# Altium PCB LedBlinker Rounded.PcbDoc
Units mil, origin at the board's own origin, x right, y up, seen from the top; angles counter-clockwise.
Board outline 1050 x 1050 mil, 2 copper layers (Top Layer, Bottom Layer), stack 64.8 mil thick; 36 components, 35 nets, 124 pads, 0 vias.
Unrouted connection lines stored in the file: 81.
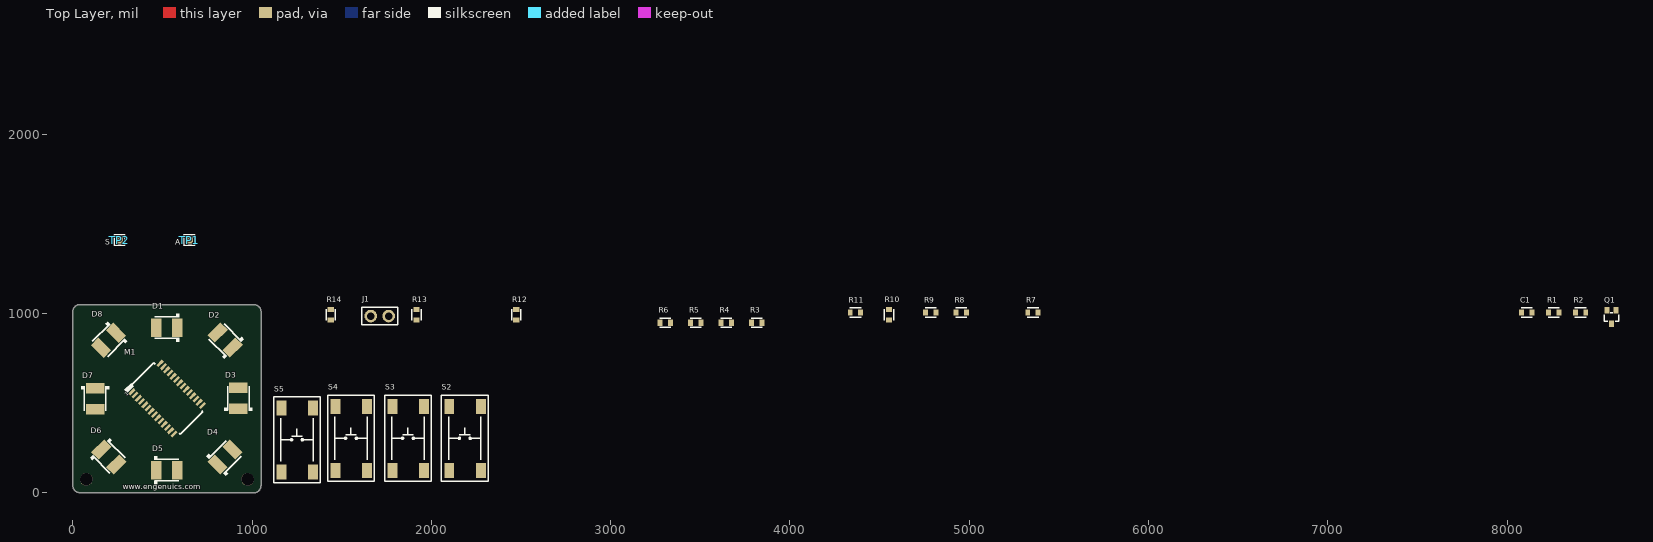
[diagram p0: Top Layer view]
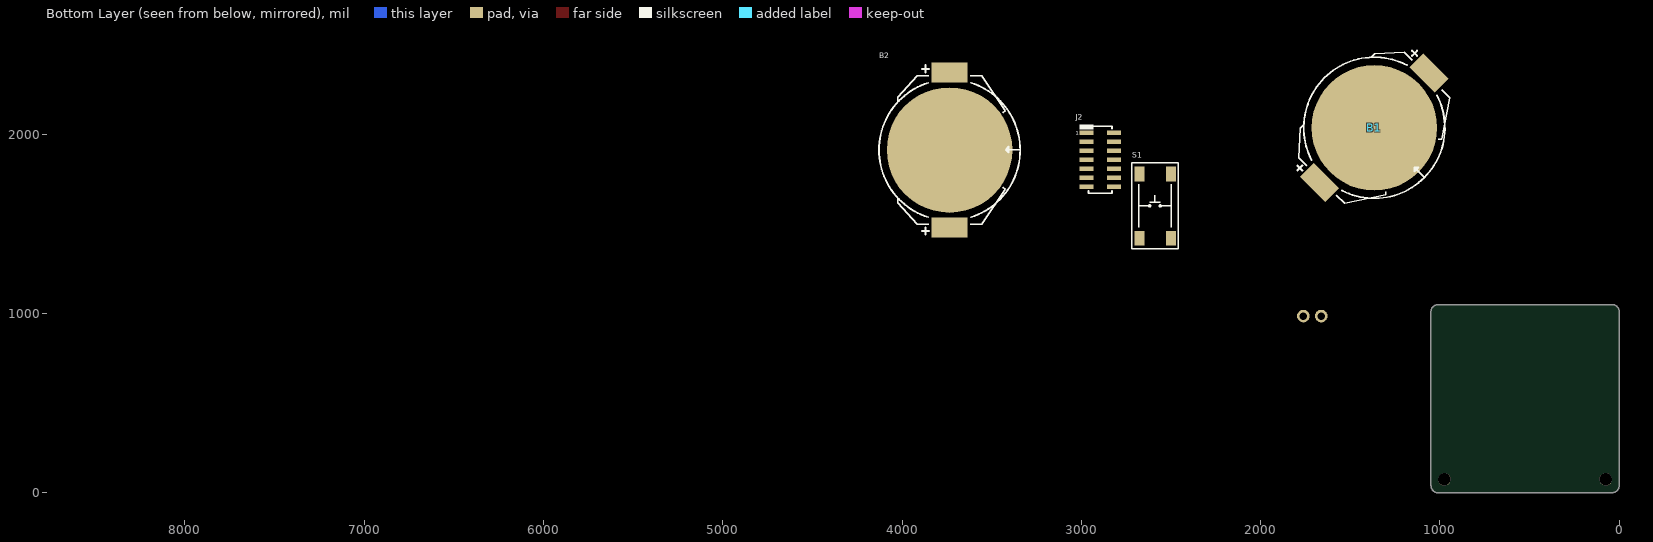
[diagram p1: Bottom Layer view, seen from below]

## Layer stack, top to bottom
Top Solder: solder mask 0.4, Solder Resist, Dk 3.5
Top Layer: signal copper 1.4
Dielectric1: core 62, FR-4, Dk 4.8
Bottom Layer: signal copper 1.4
Bottom Solder: solder mask 0.4, Solder Resist, Dk 3.5

## Board outline
0,40 0,1010 0,1010.43 cw(c40,1010) 39.57,1050 40,1050 1010,1050 1010.43,1049.57 cw(c1010,1009.57) 1050,1010 1050,40 1049.57,39.57 cw(c1009.57,40) 1010,0 40,0 39.57,0.43 cw(c40,40.43)

## Design rules (kind name [scope] priority, off if disabled: settings)
Clearance ClearancePolygon [All vs InPoly] p1: gap=20 ignorepadtopadclearanceinfootprint=FALSE except(0: Arc-Hole Track-Hole SMDPad-Hole THPad-Hole Via-Hole Fill-Hole Poly-Hole Region-Hole Text-Hole)
Clearance [All] p2: gap=7 ignorepadtopadclearanceinfootprint=FALSE except(0: Arc-Hole Track-Hole SMDPad-Hole THPad-Hole Via-Hole Fill-Hole Poly-Hole Region-Hole Text-Hole)
HoleSize [All] p1: absolutevalues=TRUE maxlimit=250 minlimit=17 maxpercent=80.000 minpercent=20.000
MinimumSolderMaskSliver [All] p1 off: minsoldermaskwidth=10
PolygonConnect PolygonConnectVia [All vs IsVia] p1: connectstyle=Direct reliefconductorwidth=10 reliefentries=4 polygonreliefangle="90 Angle" airgapwidth=10
PolygonConnect [All] p2: connectstyle=Relief reliefconductorwidth=10 reliefentries=4 polygonreliefangle="90 Angle" airgapwidth=10
RoomDefinition myLEDBlinker [InComponentClass('myLEDBlinker')] p1: confinementstyle=ConfineIn formatcopy=TRUE lockcomponents=FALSE outline 1095,55 8643,55 8643,1141 1095,1141
RoutingVias [All] p1: holewidth=17 width=26 viastyle="Through Hole" minholewidth=17 minwidth=26 maxholewidth=200 maxwidth=250
SilkToSilkClearance [All] p1 off: silktosilkclearance=10
SilkToSolderMaskClearance SilkscreenOverComponentPads [IsPad] p1 off: minsilkscreentomaskgap=7 clearancetoexposedcopper=TRUE
SolderMaskExpansion [All] p1: expansion=0
Width [All] p1: maxlimit=250 minlimit=7 preferedwidth=10
26 further rules are at their usual default settings.

## Components (designator, comment, footprint, x,y, rotation, side; value= is the part's Value field where it differs from the comment)
B1 "CR2032" "CONN BATTERY HOLDER CR2032" 1366,2036 r135 bottom
B2 "CR2032" "CONN BATTERY HOLDER CR2032" 3735,1912 r90 bottom
C1 "1uF" 0603 8110,1006 r0 top
D1 "CYN" "PLCC-2 AK" 524,921 r90 top
D2 "GRN" "PLCC-2 AK" 850,852 r45 top
D3 "YLW" "PLCC-2 AK" 923,527.09 r0 top
D4 "ORG" "PLCC-2 AK" 849.28,199.28 r315 top
D5 "RED" "PLCC-2 AK" 524,126 r270 top
D6 "PNK" "PLCC-2 AK" 201,200 r225 top
D7 "PRPL" "PLCC-2 AK" 125,525 r180 top
D8 "BLU" "PLCC-2 AK" 199.72,850.72 r135 top
J1 "RESET PADS" HDR1X2 1712,986 r0 top
J2 "JTAG/SERIAL" "CONN 14POS 7X2 SMT FEMALE SMALL" 2894.65,1858 r180 bottom
M1 "MSP430F2122" TSSOP28 526,525 r315 top
Q1 "DMG1013" SC-70-3 8582,980 r0 top
R1 "100k" 0603 8260,1006 r0 top
R2 "100k" 0603 8410,1006 r0 top
R3 "390R" 0603 3815,948 r0 top
R4 "390R" 0603 3645,948 r0 top
R5 "390R" 0603 3475,948 r0 top
R6 "390R" 0603 3305,948 r0 top
R7 "390R" 0603 5355,1006 r0 top
R8 "390R" 0603 4955,1006 r0 top
R9 "390R" 0603 4785,1006 r0 top
R10 "390R" 0603 4552,993 r90 top
R11 "100k" 0603 4365,1006 r0 top
R12 "100k" 0603 2473,993 r90 top
R13 "100k" 0603 1917,993 r90 top
R14 "100k" 0603 1439,993 r90 top
S1 "TL3301" "SWITCH TACT SMT TL3301" 2588,1599 r90 bottom
S2 "TL3301" "SWITCH TACT SMT TL3301" 2188,303 r90 top
S3 "TL3301" "SWITCH TACT SMT TL3301" 1871,303 r90 top
S4 "TL3301" "SWITCH TACT SMT TL3301" 1553,303 r90 top
S5 "TL3301" "SWITCH TACT SMT TL3301" 1252,295 r90 top
TP1 "A" "TEST POINT SMT" 650,1410 r0 top
TP2 "S" "TEST POINT SMT" 260,1410 r90 top

## Footprints (in the part's own frame and the unit in brackets; to place one, negate y for a bottom-side part, rotate by r counter-clockwise, add the part's x,y. Pads: shape width x height; smd on the part's side, far side on the other; paste and mask are expansions set on the pad)
0603 [mil]
  rect 27x35 smd: 1(-29,0) 2(29,0)
  silkscreen extent -31,-26 31,26
"CONN 14POS 7X2 SMT FEMALE SMALL" [mm] "JTAG/SERIAL Connector Footprint"
  rect 2x0.63 smd: 1(-1.95,3.81) 2(1.95,3.81) 3(-1.95,2.54) 4(1.95,2.54) 5(-1.95,1.27) 6(1.95,1.27) 7(-1.95,0) 8(1.95,0) 9(-1.95,-1.27) 10(1.95,-1.27) 11(-1.95,-2.54) 12(1.95,-2.54) 13(-1.95,-3.81) 14(1.95,-3.81)
  silkscreen extent -2.95,-4.74 1.65,5
"CONN BATTERY HOLDER CR2032" [mm]
  rect 2.79x5.08 smd: +(-10.985,0) +(10.985,0)
  round 17.78 smd: -(0,0)
  silkscreen extent -11.99,-10 12,10
HDR1X2 [mil]
  round 70 hole 42: 1(-50,0) 2(50,0)
  silkscreen extent -100,-50 100,50
"PLCC-2 AK" [mil]
  rect 102x59 smd: A(0,59) K(0,-59)
  silkscreen extent -79,-72 79,68
SC-70-3 [mm]
  rect 0.7x0.9 smd paste+0 mask+0: 1(0.65,0.95) 2(-0.65,0.95) 3(0,-0.95)
  silkscreen extent -1.05,-0.6 1.05,0.65
"SWITCH TACT SMT TL3301" [mil]
  rect 83x55 smd: 1(-179,-88.5) 2(179,-88.5) 3(-179,88.5) 4(179,88.5)
  silkscreen extent -239,-129 241,132
"TEST POINT SMT" [mil]
  rect 40x40 smd paste-3937.01: 1(0,0)
  silkscreen extent -30,-30 30,30
TSSOP28 [mm]
  rect 0.4x1.1 smd: 1(-4.225,-2.85) 2(-3.575,-2.85) 3(-2.925,-2.85) 4(-2.275,-2.85) 5(-1.625,-2.85) 6(-0.975,-2.85) 7(-0.325,-2.85) 8(0.325,-2.85) 9(0.975,-2.85) 10(1.625,-2.85) 11(2.275,-2.85) 12(2.925,-2.85) 13(3.575,-2.85) 14(4.225,-2.85) 15(4.225,2.85) 16(3.575,2.85) 17(2.925,2.85) 18(2.275,2.85) 19(1.625,2.85) 20(0.975,2.85) 21(0.325,2.85) 22(-0.325,2.85) 23(-0.975,2.85) 24(-1.625,2.85) 25(-2.275,2.85) 26(-2.925,2.85) 27(-3.575,2.85) 28(-4.225,2.85) 28(-4.225,2.85)
  silkscreen extent -5.18,-3.43 4.9,2.25

## Part data
B1 B2: library part "CONN BATTERY HOLDER CR2032", "3V Coincell Battery", 2. Manufacturer=FCI, 3. Manufacturer Part Number=BK-912, 4. Digi-Key Part Number=BK-912-ND, 5. Internal Part Number=100192, 1. Description="CONN HOLDER COIN CELL 20MM SMD", 6. Last Modified=2012-09-03, 7. Modified By=JRL
C1: library part "CAPACITOR NON-POLARIZED", 1. Description="CAP [TYPE] [VALUE] [TOLERANCE] [VOLTAGE] [CLASS] [PACKAGE]"
D1: library part "LED AK", "CYAN", 1. Description="LED [COLOR] [STYLE] [PACKAGE] [MOUNT]"
D2: library part "LED AK", "GREEN", 1. Description="LED [COLOR] [STYLE] [PACKAGE] [MOUNT]"
D3: library part "LED AK", "YELLOW", 1. Description="LED [COLOR] [STYLE] [PACKAGE] [MOUNT]"
D4: library part "LED AK", "ORANGE", 1. Description="LED [COLOR] [STYLE] [PACKAGE] [MOUNT]"
D5: library part "LED AK", 1. Description="LED [COLOR] [STYLE] [PACKAGE] [MOUNT]"
D6: library part "LED AK", "PINK", 1. Description="LED [COLOR] [STYLE] [PACKAGE] [MOUNT]"
D7: library part "LED AK", "PURPLE", 1. Description="LED [COLOR] [STYLE] [PACKAGE] [MOUNT]"
D8: library part "LED AK", "BLUE", 1. Description="LED [COLOR] [STYLE] [PACKAGE] [MOUNT]"
J1: library part "CONN SIP 2"
J2: library part "CONN JTAG/SERIAL FEMALE", 2. Manufacturer=FCI, 3. Manufacturer Part Number=20021321-00014T4LF, 4. Digi-Key Part Number=609-3771-ND, 5. Internal Part Number=100254, 1. Description="CONN TERMINAL 14POS 7X12 1.27MM VERT SMD", 6. Last Modified=2018-10-07, 7. Modified By=BJW
M1: library part "MCU MSP430F2122 TSSOP28", 2. Manufacturer=TI, 3. Manufacturer Part Number=MSP430F2122TPWR, 4. Digi-Key Part Number=296-23365-ND, 1. Description="MCU MSP430F2122 TSSOP28 LED BLINKER", 6. Last Modified=2018-10-07, 7. Modified By=BJW
Q1: library part "TRANS PMOS 1G 2S 3D"
R1 R2 R3 R4 R5 R6 R7 R8 R9 R10 R11 R12 R13 R14: library part RESISTOR, 1. Description="RES [VALUE] [POWER] [TOLERANCE] [PACKAGE] [CONSTRUCTION]"
S1 S2 S3 S4 S5: library part "SWITCH SPST TL3301 JLEAD", "SPST TACT SWITCH", 2. Manufacturer=E-Switch, 3. Manufacturer Part Number=TL3301xxx, 1. Description="SWITCH TACT 260GF H=5.0MM SMT", 6. Last Modified=2014-10-24, 7. Modified By=JRL
TP1 TP2: library part "TEST POINT SMT", 2. Manufacturer=N/A, 1. Description="Test pad", 3. Manufacturer Part Number=N/A, 4. Digi-Key Part Number=N/A, 5. Internal Part Number=N/A, 6. Last Modified="June 12, 2008", 7. Modified By=JRL

## Free pads (board coordinates)
  round 70 hole 70 unplated paste-100 mask-100: ""(75,75) ""(975,75)

## Nets (pads, with @x,y where several pads share a name; then routed paths per layer and width w, separated by ;. In a path a pad name is that pad's centre, name@x,y a point inside that pad or via, vN(x,y) a via of type N, cw(c..) or ccw(c..) an arc to the next point about the centre after c; other vN are vias at no path point)
"BTN 1": M1.20 R14.1 S5.3 S5.4
"BTN 2": M1.19 R13.1 S4.3 S4.4
"BTN 3": M1.14 R12.1 S3.3 S3.4
"BTN 4": M1.6 R11.1 S2.3 S2.4
GND: B1.- B2.- C1.2 D1.K D2.K D3.K D4.K D5.K D6.K D7.K D8.K J1.1 J2.13 M1.4 Q1.1 S1.1 S1.2 S2.1 S2.2 S3.1 S3.2 S4.1 S4.2 S5.1 S5.2
LED1: M1.23 R10.1
LED2: M1.22 R9.1
LED3: M1.17 R8.1
LED4: M1.13 R7.1
LED5: M1.12 R6.1
LED6: M1.11 R5.1
LED7: M1.10 R4.1
LED8: M1.24 R3.1
NetD1_A: D1.A R10.2
NetD2_A: D2.A R9.2
NetD3_A: D3.A R8.2
NetD4_A: D4.A R7.2
NetD5_A: D5.A R6.2
NetD6_A: D6.A R5.2
NetD7_A: D7.A R4.2
NetD8_A: D8.A R3.2
NetM1_8: M1.8 TP1.1
NetM1_9: M1.9 TP2.1
PIMO: J2.12 M1.16
POMI: J2.14 M1.15
RST: J1.2 J2.11 M1.7 R1.2
"RST BTN": M1.21 R2.1 S1.3 S1.4
TCK: J2.7 M1.25
TDI: J2.3 M1.27
TDO: J2.1 M1.28
TEST: J2.8 M1.1
TICK: J2.10 M1.3
TMS: J2.5 M1.26
VBAT: B1.+ B2.+ Q1.3
VCC: C1.1 J2.9 M1.2 Q1.2 R1.1 R2.2 R11.2 R12.2 R13.2 R14.2
pads on no net: J2.2 J2.4 J2.6 M1.5 M1.18

## Silkscreen, mask and mechanical layers (free items; w line width, h text height)
Top Overlay:
  text "www.engenuics.com" at 279,20 h30
Mechanical 1:
  lines w7: 0,1010 0,40 ccw(c40,40.43) 39.56,0.44 ; 0,1010.43 cw(c40,1010) 39.57,1050 ; 40,0 1010,0 ccw(c1009.57,40) 1049.56,39.56 ; 40,1050 1010,1050 ; 1010.44,1049.56 cw(c1010,1009.57) 1050,1010 1050,40
Mechanical 5:
  region: 343,596 326.74,612.26 288.55,574.08 304.82,557.82
  region: 845.46,741.4 859.61,755.54 841.93,773.22 827.79,759.08
  region: 944.46,840.39 958.6,854.54 940.92,872.21 926.78,858.07
  region: 308.6,845.46 294.46,859.61 276.78,841.93 290.92,827.79
  region: 209.61,944.46 195.46,958.6 177.79,940.92 191.93,926.78
  region: 205,599 185,599 185,574 205,574
  region: 65,599 45,599 45,574 65,574
  rectangle: 985,451 1005,476
  rectangle: 845,451 865,476
  region: 105.54,210.61 91.4,196.46 109.08,178.79 123.22,192.93
  region: 204.54,309.6 190.39,295.46 208.07,277.78 222.21,291.92
  region: 451,205 451,185 476,185 476,205
  region: 451,65 451,45 476,45 476,65
  region: 840.39,105.54 854.54,91.4 872.21,109.08 858.07,123.22
  region: 741.4,204.54 755.54,190.39 773.22,208.07 759.08,222.21
  region: 599,843 599,863 574,863 574,843
  region: 599,983 599,1003 574,1003 574,983
  lines w7: 329.02,594.42 453.47,718.87 ; 454.02,718.42 458.97,713.47 ; 590.65,334.21 596.31,328.55 720.76,453 715.1,458.66 ; 65,439 185,439 185,454 185,609 65,609 65,439 ; 96.47,217.68 107.08,207.07 216.68,97.47 301.53,182.32 181.32,302.53 96.47,217.68 ; 96.47,831.32 181.32,746.47 191.93,757.08 301.53,866.68 216.68,951.53 96.47,831.32 ; 439,65 439,185 609,185 609,65 454,65 439,65 ; 442,863 442,983 612,983 612,863 457,863 442,863 ; 746.47,181.32 831.32,96.47 841.93,107.08 951.53,216.68 866.68,301.53 746.47,181.32 ; 746.47,868.68 757.08,858.07 866.68,748.47 951.53,833.32 831.32,953.53 746.47,868.68 ; 865,439 985,439 985,454 985,609 865,609 865,439
Mechanical 6:
  rectangle: 2,936 32,1016
  lines w5: 797,900 841,900 ; 841,866 841,934 ; 6,786 380,786 380,1014 6,1014 6,786 ; 744,780 744,1016 980,1016 980,780 744,780
  lines w7: 7,835 21,835 ; 109,305 109,239.33 303.6,109.6 322.5,128.5 ; 109,540 109,600.42 228.55,710 296,710 ; 365,835 379,835 ; 365,965 379,965 ; 508,99 538,99 533,104 513,104 ; 523,35.67 523,114 ; 727,126 744,109 939,239 939,310 ; 756,710 819.27,710 939,600.25 939,540 ; 523,114 543,94 503,94 523,114

## Dimensions
1010,1050 to 1010,0 on Mechanical 5
0,1010 to 1050,1010 on Mechanical 5

## Text inside footprints (layer, text, board x,y; h text height)
J2: Bottom Overlay "1" at 3031.46,1997.76 h19.68
M1: Top Overlay "1" at 301.85,539.85 h19.68 r45